# EAGLE board Glorious Bojo-Snaget (EAGLE 7.6.0)

Size 56.82 x 53.33 mm. Coordinates in mm from the lower left corner, seen from the top.
Outline: 0,0 56.82,0 56.82,53.33 0,53.33 0,0
Copper layers (1*16): Top 0.035mm / dielectric 1.5mm / Bottom 0.035mm
Design rules "default": minimum track width 10mil, minimum drill 24mil, track to track 8mil, track to pad 8mil, pad to pad 8mil, via to via 8mil, smd to smd 8mil, copper to edge 40mil, drill to drill 8mil, minimum pad ring 10mil, minimum via ring 8mil, stop-mask expansion 4mil, vias tented up to drill 0mil, thermal gap 10mil

## Footprints (pad centres in the part's own frame; a part is rotated, then mirrored left to right if it is on the bottom)
DC-POWER = drill 0.889 pad 2.54 octagon: + 0,2.54; - 0,-2.54
LED5MM = drill 0.813 octagon: A -1.27,0; K 1.27,0
0207/10 = drill 0.813 octagon: 1 -5.08,0; 2 5.08,0

## Placement (x,y rotation side)
BAT2  [DC-POWER]  5,86.28 0 top  (outside the outline)
BAT3  [DC-POWER]  5,124.38 0 top  (outside the outline)
D2  [LED5MM]  5,111.68 0 top  (outside the outline)
D3  [LED5MM]  5,137.08 0 top  (outside the outline)
D4  [LED5MM]  5,149.78 0 top  (outside the outline)
D5  [LED5MM]  5,162.48 0 top  (outside the outline)
Meter1  [DC-POWER]  5,10.08 0 top
Meter2  [DC-POWER]  5,73.58 0 top  (outside the outline)
R1  10k‎Ω  [0207/10]  5,22.78 0 top
R2  10k‎Ω  [0207/10]  5,35.48 0 top
R3  10k‎Ω  [0207/10]  5,48.18 0 top
R4  10k‎Ω  [0207/10]  5,60.88 0 top  (outside the outline)
R6  1k‎Ω  [0207/10]  5,98.98 0 top  (outside the outline)
R7  1k‎Ω  [0207/10]  5,175.18 0 top  (outside the outline)
R8  1k‎Ω  [0207/10]  5,187.88 0 top  (outside the outline)
R9  1k‎Ω  [0207/10]  5,200.58 0 top  (outside the outline)

## Library data of the parts
BAT2 BAT3 D2-D5 Meter1 Meter2 R1-R4 R6-R9 = AUTODESK_CIRCUITS_BREADBOARD

## Nets
N$1: Meter1.+ R1.2 R2.2
N$2: Meter1.- R1.1 R2.1
N$3: R3.2 R4.1
N$4: Meter2.- R3.1
N$5: Meter2.+ R4.2
N$6: BAT2.- D2.K
N$7: D2.A R6.1
N$8: BAT2.+ R6.2
N$9: BAT3.- R7.1 R8.1 R9.1
N$10: D4.K R8.2
N$11: D3.K R7.2
N$12: BAT3.+ D3.A D4.A D5.A
N$13: D5.K R9.2

## Tracks (layer width: path | path; a pad name or v marks a point on that pad's centre or on a via)
N$1  (2 unrouted)
N$2  (2 unrouted)
N$3  (1 unrouted)
N$4  (1 unrouted)
N$5  (1 unrouted)
N$6  (1 unrouted)
N$7  (1 unrouted)
N$8  (1 unrouted)
N$9  (3 unrouted)
N$10  (1 unrouted)
N$11  (1 unrouted)
N$12  (3 unrouted)
N$13  (1 unrouted)